# Altium PCB test_1.PcbDoc
Units mil, origin at the board's own origin, x right, y up, seen from the top; angles counter-clockwise.
Board outline 2760.03 x 1658.57 mil, 2 copper layers (Top Layer, Bottom Layer); 101 components, 102 nets, 399 pads, 126 vias.
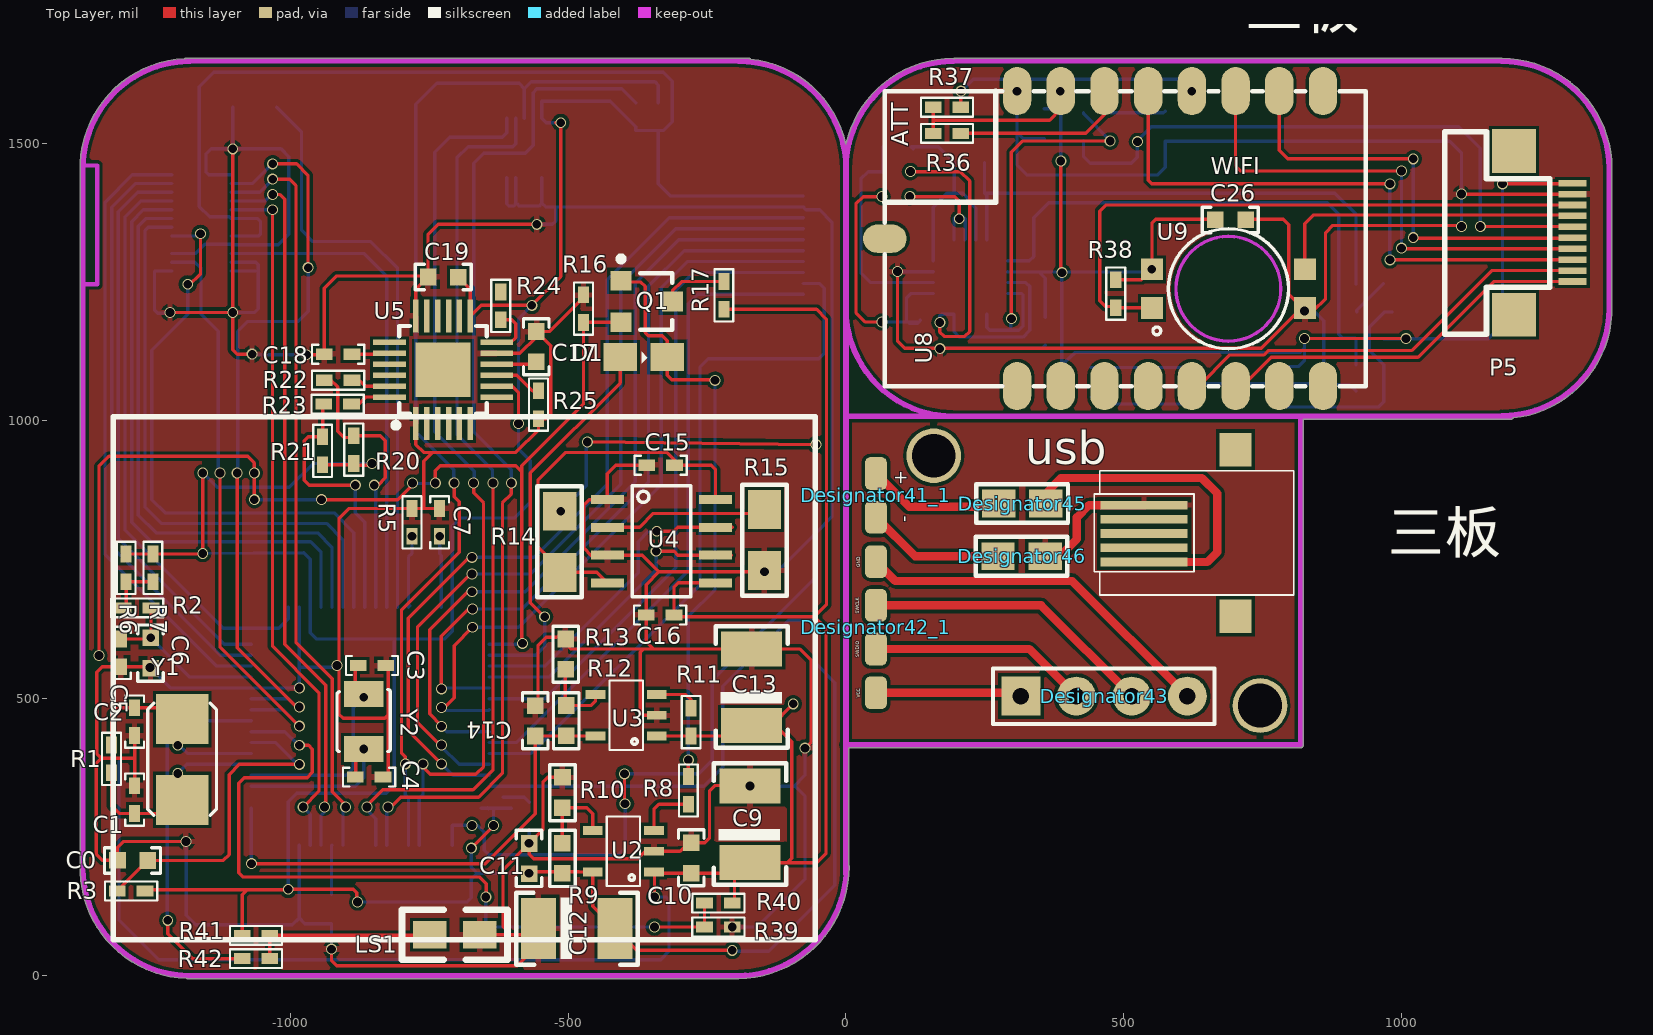
[diagram p0: Top Layer view]
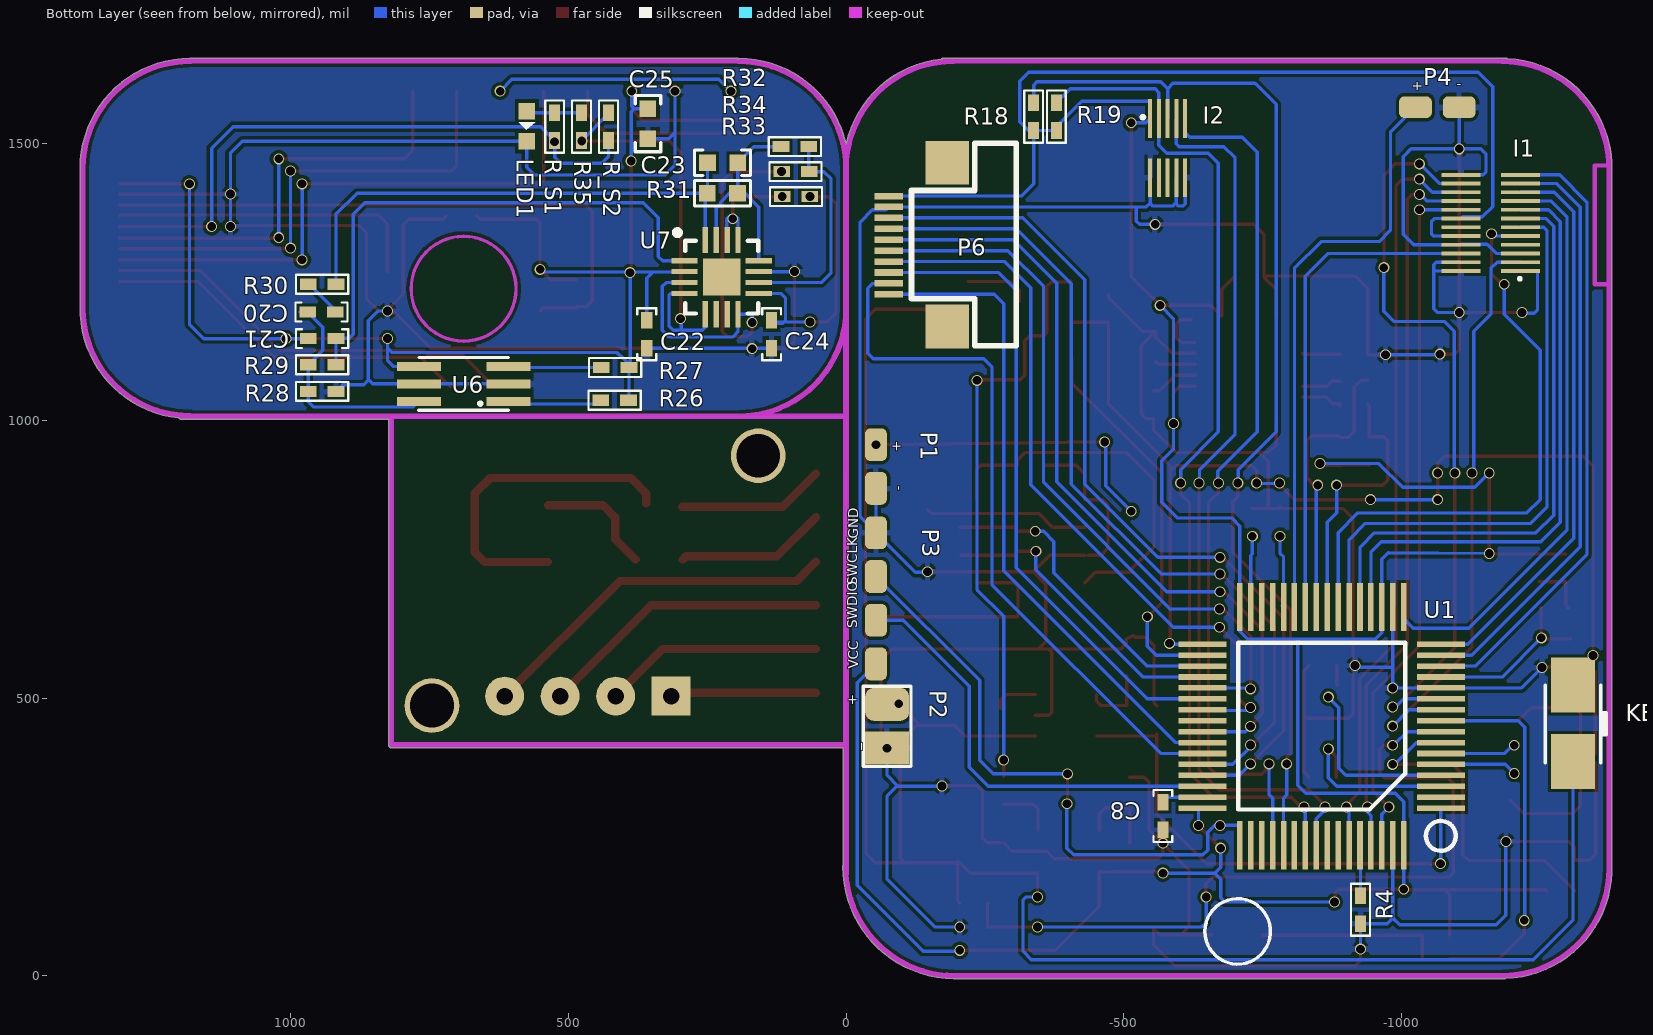
[diagram p1: Bottom Layer view, seen from below]

## Layer stack, top to bottom
Top Layer: signal copper 1.4
Dielectric: dielectric 12.6, FR-4, Dk 4.8
Bottom Layer: signal copper 1.4

## Board outline
-1188.38,-4.82 cw(c-1181.89,193) -1379.7,186.26 cw(c-1375,188) -1380.01,188 -1380.01,1462 cw(c-1375,1462) -1379.73,1463.65 cw(c-1182,1454.89) -1191.41,1652.59 cw(c-1188.46,1648.54) -1188.46,1653.56 -176,1653.56 cw(c-176,1648.54) -172.2,1651.82 cw(c-193.11,1455) -0.04,1498.6 cw(c193,1454.89) 193,1652.82 cw(c193,1647.8) 194.87,1652.46 cw(c198,1648.54) 198,1653.56 1179.46,1653.56 cw(c1179.46,1648.54) 1181.89,1652.93 cw(c1181.89,1455) 1379.82,1455 cw(c1374.8,1455) 1379.79,1454.48 cw(c1375,1453) 1380.02,1453 1380.02,1193 cw(c1375,1193) 1379.62,1191.05 cw(c1182,1202.11) 1202.17,1005.21 cw(c1198,1008) 1198,1002.98 824.02,1002.98 824.02,416 cw(c819,416) 819,410.99 5.02,410.99 5.02,199.14 cw(c0.66,196.66) 5.67,196.66 cw(c-196,196.66) -193.63,-5 cw(c-194,0) -194,-5.01 -1187,-5.01 cw(c-1187,0)

## Design rules (kind name [scope] priority, off if disabled: settings)
Clearance [All] p1: gap=6
PolygonConnect [All] p1: connectstyle=Relief reliefconductorwidth=10 reliefentries=4 polygonreliefangle="90 Angle"
RoutingVias [All] p1: holewidth=12 width=16 viastyle="Through Hole" minholewidth=28 minwidth=50 maxholewidth=28 maxwidth=50
SilkscreenOverComponentPads [All] p1: minsilkscreentomaskgap=10
SolderMaskExpansion [All] p1: expansion=4
Width [All] p1: maxlimit=20 minlimit=6 preferedwidth=6
27 further rules are at their usual default settings.

## Classes and differential pairs
component class test_watch: C0 C1 C2 C3 C4 C5 C6 C7 C8 C9 C10 C11 C12 C13 C14 C15 C16 C17 C18 C19 C20 C21 C22 C23 C24 C25 C26 D1 I1 I2 KEY1 LED1 LS1 P1 P2 P3 P4 P5 P6 Q1 R1 R2 R3 R4 R5 R6 R7 R8 R9 R11 R12 R14 R15 R16 R17 R18 R19 R20 R21 R22 R23 R24 R25 R26 R27 R28 R29 R30 R31 R32 R33 R34 R35 R36 R37 R38 R39 R40 R41 R42 R_S1 R_S2 U1 U2 U3 U4 U5 U6 U7 U8 Y1 Y2

## Components (designator, comment, footprint, x,y, rotation, side; value= is the part's Value field where it differs from the comment)
C0 "104" C_0603 -1258.02,207.9 r180 top
C1 "22pf" C_0402 -1281.8,342.47 r270 top
C2 "22pf" C_0402 -1281.8,432.98 r90 top
C3 "10pf" C_0402 -879.1,559.02 r0 top
C4 "10pf" C_0402 -884.1,358.02 r0 top
C5 "10uf" C_0402 -1305.9,606.98 r270 top
C6 "104" C_0603 -1252.9,608.98 r270 top
C7 "2.2uf" C_0402 -732.1,792.02 r90 top
C8 "2.2uf" C_0402 -571,313 r270 bottom
C9 "220uF" C_3528 -173,204 r90 top
C10 "104" C_0603 -279,185 r90 top
C11 "104" C_0603 -571,184 r90 top
C12 "220uF" C_3528 -554,85 r0 top
C13 "220uF" C_3528 -170,451 r90 top
C14 "104" C_0603 -560,432 r90 top
C15 "10uf" C_0402 -309,920 r180 top
C16 "10uf" C_0402 -360,650 r0 top
C17 "104" C_0603 -558,1161 r270 top
C18 "10uf" C_0402 -940,1120 r0 top
C19 "104" C_0603 -753,1259 r0 top
C20 "10uf" C_0402 920,1196 r0 bottom
C21 "2.2uf" C_0402 919,1148 r0 bottom
C22 "10uf" C_0402 359,1131 r90 bottom
C23 "0.01uf" C_0603 195,1465 r0 bottom
C24 "2.2uf" C_0402 134,1131 r90 bottom
C25 "104" C_0603 357,1508 r90 bottom
C26 "104" C_0603 720,1362 r180 top
D1 "1N4007" D_0805 -408,1114 r0 top
Designator41_1 "Comment" CHARGE_2 54,905 r270 top
Designator42_1 "Comment" SWD 54,510 r90 top
Designator43 "Comment" Header-4 315,504 r0 top
Designator45 "Comment" R_0805 275,851 r0 top
Designator46 "Comment" R_0805 274,756 r0 top
I1 "TFT_1.5" "DF37NB-24DS-0.4V - duplicate" -1215,1270 r0 bottom
I2 "TCH_IC_10" DF37NB-10DS-0.4V -611,1545 r270 bottom
KEY1 "button_2pin" SMD2_3.5 -1310,524 r270 bottom
LED1 "LED1" D_0603 575,1558 r270 bottom
LS1 "LSENS" 0805 -660,74 r180 top
P1 "contactor" CHARGE_2 -54,957 r270 bottom
P2 "CELL" CELL_2 -74,489 r270 bottom
P3 "Header 4" SWD -54,561.91 r90 bottom
P4 "MIC/LINE" CHARGE_2 -1026,1565 r180 bottom
P5 "Header-10" FPC_10_0.5 1309,1251 r90 top
P6 "Header-10" FPC_10_0.5 -77,1405 r270 bottom
Q1 "9013" SOT-23R -364,1215 r270 top
R1 "1M" R_0402 -1323.52,365.81 r90 top
R2 "10R" R_0402 -1302.1,663.02 r0 top
R3 "10k" R_0402 -1263.02,152.9 r180 top
R4 "10k" R_0402 -927.1,94.02 r90 bottom
R5 "100k" R_0402 -782.1,842.02 r270 top
R6 "0R" R_0402 -1296.98,710.1 r90 top
R7 "0R" R_0402 -1248.98,710.1 r90 top
R8 "100k" R_0402 -284,309 r90 top
R9 "16.7k" R_0603 -511,239 r270 top
R10 "Comment" R_0603 -510.94,357.5 r270 top
R11 "100k" R_0402 -279,482 r270 top
R12 "16.7k" R_0603 -504,487 r270 top
R13 "Comment" R_0603 -505,607 r270 top
R14 "0.4" R_1206 -516,837 r270 top
R15 "0.4" R_1206 -147,840 r270 top
R16 "2k" R_0402 -473,1177 r90 top
R17 "2k" R_0402 -220,1201 r90 top
R18 "4.7k" R_0402 -338,1573 r270 bottom
R19 "4.7k" R_0402 -379,1523 r90 bottom
R20 "4.7k" R_0402 -887,923 r90 top
R21 "4.7k" R_0402 -943,921 r90 top
R22 "120" R_0402 -940,1073 r0 top
R23 "120" R_0402 -941,1030 r0 top
R24 "120" R_0402 -622,1232 r270 top
R25 "120" R_0402 -554,1004 r90 top
R26 "10K" R_0402 392,1037 r0 bottom
R27 "10K" R_0402 391,1096 r0 bottom
R28 "30k" R_0402 919,1053 r0 bottom
R29 "100k" R_0402 919,1101 r0 bottom
R30 "22k" R_0402 969,1246 r180 bottom
R31 "20M" R_0603 250,1410 r180 bottom
R32 "100" R_0402 117,1494 r180 bottom
R33 "30K" R_0402 115,1404 r180 bottom
R34 "10k" R_0402 66,1449 r0 bottom
R35 "10k" R_0402 476.5,1555 r270 bottom
R36 "4.7K" R_0402 207,1518 r180 top
R37 "4.7k" R_0402 207,1565 r180 top
R38 "4.7k" R_0402 486,1204 r90 top
R39 "100k" R_0402 -205,88 r180 top
R40 "100k" R_0402 -255,131 r0 top
R41 "47K" R_0402 -1088,73 r0 top
R42 "1K" R_0402 -1038,31 r180 top
R_S1 "0R" R_0402 525,1505 r90 bottom
R_S2 "0R" R_0402 428,1505 r90 bottom
U1 "STM32F405RGT6" LQFP64 -1071.79,302.17 r0 bottom
U2 "SP3819M" SPX3819 -346,187 r180 top
U3 "SP3819M" SPX3819 -341,432 r180 top
U4 "TP4056" TP4056 -430,858 r0 top
U5 "MPU6050" MPU6050_QFN24 -726,1092 r90 top
U6 "SON1303" SON7015 608,1035 r0 bottom
U7 "SON3130" SON3130_QFN16 224,1259 r180 bottom
U8 "WIFI_USR" WIFI_USR 70,1595 r90 top
U9 "Comment" MLX90615 689,1238 r180 top
usb "Comment" MicroUSB 607,848 r270 top
Y1 "8M" TXAL_5032_2 -1196.24,316.9 r90 top
Y2 "32.768k" TXAL_3215 -869.1,507.02 r270 top

## Footprints (in the part's own frame and the unit in brackets; to place one, negate y for a bottom-side part, rotate by r counter-clockwise, add the part's x,y. Pads: shape width x height; smd on the part's side, far side on the other; paste and mask are expansions set on the pad)
0805 [mil]
  rect 60x50 smd: 1(0,-0.06) 2(90,-0.06)
  silkscreen extent -50,-45 140,45
C_0402 [mil]
  rect 30x20 smd: 1(0,0) 2(50,0)
  silkscreen extent -22,-17 72,17
C_0603 [mil]
  rect 30x30 smd: 1(0,0) 2(54.5,-0.06)
  silkscreen extent -23,-23 78,23
C_3528 [mm]
  rect 1.6x2.8 smd: 1(0,0) 2(3.5,0)
  silkscreen extent -1.02,-1.65 4.55,1.65
CELL_2 [mm]
  rrect50% 1.5x2 smd: 1(0,0)
  rect 1.5x2 smd: 2(2,0)
  silkscreen extent -0.84,-1.09 2.84,1.09
CHARGE_2 [mm]
  rrect50% 1.5x1 smd: 1(0,0) 2(2,0)
D_0603 [mil]
  rect 30x30 smd: 1(0,0) 2(54.5,-0.06)
  silkscreen extent 20,-15 34,15
D_0805 [mil]
  rect 60x50 smd: 1(1,1) 2(86,1)
  silkscreen extent 40,-10 50,10
DF37NB-10DS-0.4V [mil]
  rect 70x7 smd: 1(0,-62.99) 2(0,-47.24) 3(0,-31.5) 4(0,-15.75) 5(0,0) 6(107,0) 7(107,-15.75) 8(107,-31.5) 9(107,-47.24) 10(107,-62.99)
  silkscreen extent -5,-79 1,-73
"DF37NB-24DS-0.4V - duplicate" [mil]
  rect 70x7 smd: 1(0,0) 2(0,-15.75) 3(0,-31.5) 4(0,-47.24) 5(0,-62.99) 6(0,-78.74) 7(0,-94.49) 8(0,-110.24) 9(0,-125.98) 10(0,-141.73) 11(0,-157.48) 12(0,-173.23) 13(107,-173.23) 14(107,-157.48) 15(107,-141.73) 16(107,-125.98) 17(107,-110.24) 18(107,-94.49) 19(107,-78.74) 20(107,-62.99) 21(107,-47.24) 22(107,-31.5) 23(107,-15.75) 24(107,0)
  silkscreen extent -1,12 3,16
FPC_10_0.5 [mm]
  rect 2x2 smd: 0(-1.524,2.675) 0(5.969,2.675)
  rect 0.3x1.3 smd: 1(0,0) 2(0.5,0) 3(1,0) 4(1.5,0) 5(2,0) 6(2.5,0) 7(3,0) 8(3.5,0) 9(4,0) 10(4.5,0)
  silkscreen extent -2.41,1.04 6.86,5.84
Header-4 [mil]
  rect 70x70 hole 30: 1(0,0)
  round 70 hole 30: 2(100,0) 3(200,0) 4(300,0)
  silkscreen extent -50,-50 349,50
LQFP64 [mm]
  rect 2.2x0.254 smd: 1(0,0) 2(0,-0.5) 3(0,-1) 4(0,-1.5) 5(0,-2) 6(0,-2.5) 7(0,-3) 8(0,-3.5) 9(0,-4) 10(0,-4.5) 11(0,-5) 12(0,-5.5) 13(0,-6) 14(0,-6.5) 15(0,-7) 16(0,-7.5) 33(10.9,-7.5) 34(10.9,-7) 35(10.9,-6.5) 36(10.9,-6) 37(10.9,-5.5) 38(10.9,-5) 39(10.9,-4.5) 40(10.9,-4) 41(10.9,-3.5) 42(10.9,-3) 43(10.9,-2.5) 44(10.9,-2) 45(10.9,-1.5) 46(10.9,-1) 47(10.9,-0.5) 48(10.9,0)
  rect 0.254x2.2 smd: 17(1.7,-9.2) 18(2.2,-9.2) 19(2.7,-9.2) 20(3.2,-9.2) 21(3.7,-9.2) 22(4.2,-9.2) 23(4.7,-9.2) 24(5.2,-9.2) 25(5.7,-9.2) 26(6.2,-9.2) 27(6.7,-9.2) 28(7.2,-9.2) 29(7.7,-9.2) 30(8.2,-9.2) 31(8.7,-9.2) 32(9.2,-9.2) 49(9.2,1.7) 50(8.7,1.7) 51(8.2,1.7) 52(7.7,1.7) 53(7.2,1.7) 54(6.7,1.7) 55(6.2,1.7) 56(5.7,1.7) 57(5.2,1.7) 58(4.7,1.7) 59(4.2,1.7) 60(3.7,1.7) 61(3.2,1.7) 62(2.7,1.7) 63(2.2,1.7) 64(1.7,1.7)
  silkscreen extent -0.68,-7.56 9.26,1.95
MicroUSB [mm]
  rect 0.4x4 smd: 1(0,-1.778) 2(0.65,-1.778) 3(1.3,-1.778) 4(1.95,-1.778) 5(2.6,-1.778)
  rect 1.543x1.46 smd: 6(-2.54,2.413) 7(5.08,2.413)
  silkscreen extent -1.57,-4.06 4.11,5.08
MLX90615 [mm]
  rect 1x1 smd: 1(3.5,0.889) 2(3.5,-0.889) 3(-3.5,-0.889) 4(-3.5,0.889)
  silkscreen extent -2.75,-2.75 3.45,2.75
MPU6050_QFN24 [mm]
  rect 1.5x0.25 smd: 1(-2.457,1.25) 2(-2.457,0.75) 3(-2.457,0.25) 4(-2.457,-0.25) 5(-2.457,-0.75) 6(-2.457,-1.25) 13(2.457,-1.25) 14(2.457,-0.75) 15(2.457,-0.25) 16(2.457,0.25) 17(2.457,0.75) 18(2.457,1.25)
  rect 0.25x1.5 smd: 7(-1.25,-2.457) 8(-0.75,-2.457) 9(-0.25,-2.457) 10(0.25,-2.457) 11(0.75,-2.457) 12(1.25,-2.457) 19(1.25,2.457) 20(0.75,2.457) 21(0.25,2.457) 22(-0.25,2.457) 23(-0.75,2.457) 24(-1.25,2.457)
  rect 2.5x2.5 smd: 25(0,0)
  silkscreen extent -2.66,-2 2,2.28
R_0402 [mil]
  rect 30x20 smd: 1(0,0) 2(50,0)
  silkscreen extent -22,-17 72,17
R_0603 [mil]
  rect 30x30 smd: 1(0,0) 2(54.5,-0.06)
  silkscreen extent -23,-23 78,23
R_0805 [mil]
  rect 60x50 smd: 1(0,0) 2(85,0)
  silkscreen extent -40,-35 125,35
R_1206 [mil]
  rect 70x60 smd: 1(0,0) 2(110,0)
  silkscreen extent -45,-40 155,40
SMD2_3.5 [mm]
  rect 2.5x2 smd: 1(0,0) 2(3.5,0)
  silkscreen extent 0,-1.27 3.56,1.52
SON3130_QFN16 [mm]
  rect 1.2x0.24 smd: 1(-1.7,0.75) 2(-1.7,0.25) 3(-1.7,-0.25) 4(-1.7,-0.75) 9(1.7,-0.75) 10(1.7,-0.25) 11(1.7,0.25) 12(1.7,0.75)
  rect 0.24x1.2 smd: 5(-0.75,-1.7) 6(-0.25,-1.7) 7(0.25,-1.7) 8(0.75,-1.7) 13(0.75,1.7) 14(0.25,1.7) 15(-0.25,1.7) 16(-0.75,1.7)
  rect 1.7x1.7 smd: ""(0,0)
  silkscreen extent -2.16,-1.67 1.67,2.16
SON7015 [mm]
  rect 2x0.4 smd: 1(0,0) 2(0,-0.8) 3(0,-1.6) 4(4.1,-1.6) 5(4.1,-0.8) 6(4.1,0)
  silkscreen extent 0,-2.01 4.11,0.41
SOT-23R [mm]
  rect 0.9x0.95 smd: 1(-0.95,-1.048) 2(0.95,-1.048) 3(0,1.302)
  silkscreen extent -2.07,-1.17 1.3,1.3
SPX3819 [mm]
  rect 0.9x0.4 smd: 1(0,0) 2(0,-0.95) 3(0,-1.9) 4(2.8,-1.9) 5(2.8,0)
  silkscreen extent 0.63,-2.54 2.16,0.64
SWD [mm]
  rrect50% 1.5x1 smd: 1(0,0) 2(2,0) 3(4,0) 4(6,0)
TP4056 [mm]
  rect 1.513x0.42 smd: 1(0,0) 2(0,-1.27) 3(0,-2.54) 4(0,-3.81) 5(4.953,-3.81) 6(4.953,-2.54) 7(4.953,-1.27) 8(4.953,0)
  silkscreen extent 1.14,-4.44 3.81,0.64
TXAL_3215 [mm]
  rect 1.2x1.8 smd: 1(-0.025,0) 2(2.5,0)
  silkscreen extent -0.22,-1.22 2.62,1.22
TXAL_5032_2 [mm]
  rect 2.3x2.4 smd: 1(0,0) 2(3.7,0)
  silkscreen extent -0.71,-1.57 4.42,1.57
WIFI_USR [mm]
  oval 2.2x1.3 smd: 1(-13.525,-6.051) 2(-13.525,-8.051) 3(-13.525,-10.051) 4(-13.525,-12.051) 5(-13.525,-14.051) 6(-13.525,-16.051) 7(-13.525,-18.051) 8(-13.525,-20.051) 9(-0.025,-20.051) 10(-0.025,-18.051) 11(-0.025,-16.051) 12(-0.025,-14.051) 13(-0.025,-12.051) 14(-0.025,-10.051) 15(-0.025,-8.051) 16(-0.025,-6.051)
  oval 1.3x2 smd: 17(-6.775,0)
  silkscreen extent -13.53,-22 -0.03,0

## Part data
KEY1: library part KEY_2
LED1: library part LED2, "Typical RED, GR"
P1 U4: "³äµ"
P2: "锂?"
P4: library part H
U1: library part STM32F
U2 U3: "稳?"
U5: library part M
U6 U7: "ÐÄÂ"
U8: "wifiģ?"
Y1: library part XTAL_1, "32.768k"
Y2: library part XTAL_1

## Free pads (board coordinates)
  round 98.43 hole 78.74: 1(158,937) 2(746,487)

## Via types
v1: diameter 19.68, hole 15.75, Top Layer to Bottom Layer, 126 vias

## Nets (pads, with @x,y where several pads share a name; then routed paths per layer and width w, separated by ;. In a path a pad name is that pad's centre, name@x,y a point inside that pad or via, vN(x,y) a via of type N, cw(c..) or ccw(c..) an arc to the next point about the centre after c; other vN are vias at no path point)
A1: Designator41_1.1 Designator45.1 | length 265.9
  Top Layer w15: Designator41_1.1 114,845 Designator45.1@295,845
A2: Designator41_1.2 Designator46.1 | length 271.6
  Top Layer w15: Designator41_1.2 124.26,756 288,756 Designator46.1@294,750
A3: Designator42_1.4 Designator43.4 | length 661.3
  Top Layer w15: Designator42_1.4 88.72,711.5 407.5,711.5 Designator43.4
A4: Designator42_1.3 Designator43.3 | length 528.7
  Top Layer w15: Designator42_1.3 351.52,667.48 Designator43.3
A5: Designator42_1.2 Designator43.2 | length 396.1
  Top Layer w15: Designator42_1.2 330.26,588.74 Designator43.2
A6: Designator42_1.1 Designator43.1 | length 263.5
  Top Layer w15: Designator42_1.1 309,510 Designator43.1
C\H\_CHK: U1.35 U4.7 | length 574
  Top Layer w6: v1(-341,801) -310,801 -303,808 -205,808
  Bottom Layer w6: U1.35 -542.93,558.07 -374.5,726.5 -374.5,782.5 -356,801 v1(-341,801)
EN: D1.2 Q1.1 R8.2 | length 1062
  Top Layer w6: Q1.1 -402.86,1250 -370,1250 -362,1242 -362,1159 -356,1153 -331,1153 -322,1144 D1.2 -322,1082 -314,1074 v1@-236,1074 ; R8.2 v1(-284,389)
  Bottom Layer w6: v1(-284,389) -284,648 -236,696 v1(-236,1073)
EQ_CHK: R39.2 R40.1 U1.8 | length 1428.2
  Top Layer w6: v1(-985,415.43) -968.43,415.43 -961.54,408.54 -961.54,366.46 -971,357 -1084,357 -1094,347 -1094,186 -1086,178 -660,178 -648,166 v1@-648,143 ; v1(-345,88) R39.2 R40.1 R40.1@-256,130
  Bottom Layer w6: U1.8 -1010.96,439.96 v1@-988,417 ; v1(-649,142) -649,96 -641,88 v1(-345,88)
GND: C0.2 C1.1 C2.1 C3.2 C4.2 C5.2 C6.2 C7.2 C8.2 C9.2 C10.2 C11.2 C12.1 C13.2 C14.2 C15.2 C16.1 C17.1 C18.1 C19.1 I1.1 I1.3 I1.13 I1.21 I1.23 I1.24 I2.6 I2.7 I2.10 LS1.1 P1.2 P2.2 P3.4 P4.2 P6.2 R4.1 R5.1 R10.1 R13.1 R15.2 R16.2 R25.1 R39.1 U1.12 U1.18 U1.63 U2.2 U3.2 U4.1 U4.3 U5.1 U5.11 U5.18 | length 11098.1
  Top Layer w6: C1.1 -1281.8,393 ; C2.1 -1281.8,391.81 -1341.81,391.81 ; C6.2 v1(-1254.21,555.73) -1255.46,556.98 C5.2 -1340.02,556.98 -1350,547 -1350,400 -1341.81,391.81 ; v1(-1218,1195) v1(-1105,1195) ; v1(-1189,242) -1302,242 -1312.52,231.48 C0.2 -1339.96,207.96 -1351,219 -1351,382.61 -1341.81,391.81 ; v1@-1108,1490 -1105,1487 -1105,1128 -1097,1120 v1(-1070,1120) ; v1(-972,1119) -941,1119 C18.1 -940,1239 -918,1261 C19.1@-753,1261 ; v1(-927,48) -927,27 -918,18 -592,18 -554,56 C12.1 -565,74 -604,74 -604.06,74.06 ; C4.2 -824.67,367.45 -824.67,470 ; C3.2@-834.1,559.02 -824.67,549.59 -824.67,470 ; R5.1@-786,842.02 -894.98,842.02 -913.54,823.46 -913.54,471.54 -906,464 -830.67,464 -824.67,470 ; R5.1@-782.1,845.1 R5.1 -761,842.02 ; U5.1 -775.21,957.21 -761,943 -745,943 ; U5.18 -775.21,1236.79 C19.1 -753,1336 -735,1354 v1(-557,1354) ; C7.2 -761,842.02 ; LS1.1 -604.06,74.06 ; U5.11 -587.47,1121.53 -558,1151 C17.1 ; C14.2 -555,491.44 -555,595 -540,610 -521,610 -518,613 R13.1 -505,599 -494.8,588.8 -365,588.8 ; R10.1 -537.5,357.5 -546,349 -546,263.44 C11.2 ; R16.2 -473,1221.35 -533.35,1161 C17.1 ; U4.3@-436,758 -460,758 -472,770 -472,849 -463,858 U4.1 -430,905 -415,920 C15.2 ; U4.3 -367,758 -337,728 ; U3.2 -365.4,469.4 -371,475 -371,582.8 -365,588.8 ; C10.2@-283.94,239.5 -299.03,224.4 U2.2 -361.6,224.4 -375,211 -563,211 -570.94,218.94 C11.2 ; C10.2 -254.5,239.5 -246,248 -246,333 -236,343 -174.2,343 v1(-173,341.8) C9.2@-181.64,341.8 ; v1(-147,728) -286,728 -337,728 ; v1(-74,410.26) -63,421.26 -63,569 -82.8,588.8 C13.2 -347,588.8 ; -761,842.02 -761,927 -745,943 ; -745,943 -595,943 -554,984 R25.1 -541,1004 -532,1013 -532,1135 C17.1 ; -604.06,74.06 -618,88 -618,191.44 C11.2 ; -365,588.8 -347,588.8 ; -347,588.8 -347,589 -360,602 C16.1 -360,705 -337,728
  Bottom Layer w6: v1(-1254.21,555.73) -1217.19,518.7 U1.12 -995.26,518.7 -990.26,523.7 -985.18,528.79 -985.18,556 ; v1(-1218,1195) -1219,1194 -1240,1194 -1246,1200 -1246,1270 I1.1 ; I1.3 -1171.5,1301.5 -1155,1318 -1108.76,1318 I1.21 -1022.76,1317.24 -1004,1336 -1004,1476 -1018,1490 v1(-1105,1490) ; v1(-1189,242) -1189,109 -1172,92 -997.35,92 -985.18,104.18 ; I1.24 -1060,1270 ; I1.23 -1063.75,1285.75 -1059,1281 -1059,1271 -1060,1270 ; I1.13 -1148.23,1443.23 -1153,1448 -1153,1481 -1144,1490 v1(-1105,1490) ; v1(-1105,1195) -1066,1195 -1059,1202 -1059,1269 -1060,1270 ; P4.2 -1105,1564.74 v1(-1105,1490) ; v1(-1070,1120) -1069,1119 v1(-972,1119) ; U1.63 -985.18,104.18 ; U1.18 -985.18,556 ; v1(-927,48) -927.1,48.1 R4.1 -975.02,94.02 -985.18,104.18 ; v1(-917,559) -920,556 -985.18,556 ; I2.6 -611,1391 -607,1387 -599,1387 -595.25,1390.75 ; I2.7 -595.25,1390.75 ; v1(-571,239) C8.2 ; v1(-557,1354) -529,1354 -523,1360 -523,1385.31 ; I2.10 -548.01,1391.99 ; v1(-205,88) -160,88 -74,174 -74,324 -91.8,341.8 -93.2,341.8 ; v1(-173,341.8) -93.2,341.8 ; v1@-152,727 -125.13,727 P3.4 ; v1(-74,410.26) -74,361 -93.2,341.8 ; P1.2 P3.4 ; -595.25,1390.75 -592.75,1390.75 -589,1387 -553,1387 -548.01,1391.99 ; -548.01,1391.99 -541.33,1385.31 P6.2 -72.22,1380.54 -47.68,1380.54 -25.31,1358.17 -25.31,826.81 P3.4
  other v1: -985,518.7
GND_2: C22.1 C24.1 C25.1 C26.1 LED1.2 P5.9 R28.1 U6.2 U6.5 U7.11 U8.16 U9.4 | length 3697.6
  Top Layer w6: v1(92.84,1268.84) 92.84,1143.16 105.41,1130.59 748.17,1130.59 811.58,1194 U9.4@830,1194 ; C26.1@720,1369 726,1363 788,1363 798,1353 798,1228 823,1203 U9.4@823,1195 ; U9.4@842,1198 864,1220 864,1339 877,1352 v1@1109,1352 ; v1(1109,1408.48) 1109.32,1408.16 1308.68,1408.16 P5.9
  Bottom Layer w6: v1(92.84,1268.84) U7.11 ; C24.1 354,1131 356.5,1133.5 C22.1@359,1136 ; 308.22,1518.78 319,1508 C25.1 ; v1(308.22,1594) 308.22,1460.78 326.13,1442.87 561,1442.87 575.06,1456.94 LED1.2 1087.5,1503.5 1109,1482 v1(1109,1408.48) v1(1109,1350) ; U6.2 U6.5 852.5,1066.5 860,1074 869,1065 907,1065 R28.1 ; v1(826,1198) 843,1198 861,1180 861,1075
  other v1: 169,1130
HEART_CHK: P5.6 R_S1.1 R_S2.1 | length 1116.3
  Top Layer w6: v1(1143,1350) 1308.43,1350 P5.6
  Bottom Layer w6: R_S2.1 428,1476 440,1464 514,1464 525,1475 R_S1.1 550,1530 1104,1530 1143,1491 v1@1143,1351
  other v1: 525,1503
KEY_CHK: KEY1.1 Q1.2 R16.1 U1.33 | length 1994.5
  Top Layer w6: v1(-1346,577) -1346,918 -1328,936 -1078,936 -1066,924 v1(-1066,906) v1(-1066,858) ; v1(-945,858) -808,858 -781,885 v1@-781,893 ; v1(-740,888) -740,910 -731,919 -595,919 -584,908 ; v1@-578,601 -584,607 -584,908 ; Q1.2 -472.4,1177.6 R16.1 -473,1030 -584,919 -584,908
  Bottom Layer w6: v1@-1071,858 v1(-1066,858) v1(-945,858) ; v1@-781,887 -737,887 v1@-736,888 ; v1@-737,893 v1@-736,894 ; U1.33 -584.56,597.44 v1(-583,599)
  other v1: -781,888
LIGHT_CHK: R42.2 U1.9 | length 680.4
  Top Layer w6: v1(-1222,100) -1222,76 -1177,31 R42.2
  Bottom Layer w6: v1@-1222.86,100 -1222.86,447.79 -1211,459.65 U1.9
MLX_IIC_SCL: P5.7 U9.3 | length 576.4
  Top Layer w6: U9.3@826.8,1268 826.8,1354.8 842.84,1370.84 1307.27,1370.84 P5.7
MLX_IIC_SDA: P5.8 R38.1 U9.1 | length 1120.1
  Top Layer w6: U9.1@551.2,1198 545.2,1204 R38.1 484,1206 467,1206 457,1216 457,1378 467.8,1388.8 P5.8
MOTOR_CTR: P4.1 U1.27 | length 1052.4
  Bottom Layer w6: P4.1 -981,1520 -981,1343 -961,1323 -856.01,1323 -808.01,1275 U1.27
MPU_IIC_SCL: R20.2 R22.1 U1.25 | length 517.4
  Top Layer w6: R22.1 -928,1073 -916,1061 -916,981 -905,970 R20.2@-890,970 ; R20.2 -839,973 -830,964 -830,897 -843,884 v1@-854,884
  Bottom Layer w6: v1(-850,884) -847.38,881.38 U1.25
MPU_IIC_SDA: R21.2 R23.1 U1.24 | length 489.1
  Top Layer w6: R23.1 -943,1028 R21.2 -969,971 -976,964 -976,893 -967,884 v1(-884,884)
  Bottom Layer w6: v1(-884,884) -884,834 -867.07,817.07 U1.24
MPU_INT: R24.1
NetC1_2: C1.2 R1.1 U1.5 Y1.1 | length 341.5
  Top Layer w6: R1.1 -1323.52,306.41 -1309.58,292.47 C1.2 -1220.66,292.47 Y1.1
  Bottom Layer w6: v1(-1204.02,364.74) -1187.85,380.91 U1.5
NetC2_2: C2.2 R1.2 U1.6 Y1.2 | length 320.7
  Top Layer w6: R1.2 -1323.52,471.87 -1312.41,482.98 C2.2 -1234.42,482.98 Y1.2@-1212,460.57
  Bottom Layer w6: v1@-1204.02,417.43 -1187.19,400.59 U1.6
  other v1: -1204.02,415.43
NetC3_1: C3.1 U1.4 Y2.1 | length 361
  Top Layer w6: Y2.1@-884.1,523.02 C3.1@-884.1,559.02
  Bottom Layer w6: U1.4 -1071.72,361.16 -900.84,361.16 -887.94,374.06 -887.94,483.18 v1(-869.1,502.02)
NetC4_1: C4.1 U1.3 Y2.2 | length 317.1
  Top Layer w6: C4.1@-883.1,358.02 -883.1,394.6 v1(-869.1,408.6)
  Bottom Layer w6: U1.3 -884.46,341.54 -869.1,356.9 v1(-869.1,408.6)
NetC5_1: C5.1 C6.1 R2.2 U1.13 | length 318.5
  Top Layer w6: C5.1 -1254.9,606.98 v1(-1252.9,608.98) -1252.1,609.78 R2.2
  Bottom Layer w6: v1(-1252.9,608.98) -1182.31,538.39 U1.13
NetC7_1: C7.1 U1.31 | length 128.8
  Bottom Layer w6: v1(-732.1,792.02) -732.1,760.1 -729.27,757.27 U1.31
NetC8_1: C8.1 U1.47 | length 50.3
  Bottom Layer w6: U1.47@-617.66,321.85 -579.85,321.85 C8.1
NetC15_1: C15.1 R14.2 U4.4 U4.8 | length 681.8
  Top Layer w6: R14.2 -449,727 U4.4 ; R14.2@-516,734 -555,773 -555,893 -505,943 -323,943 -309,929 C15.1 -243,920 -235,912 U4.8
NetC17_2: C17.2 U5.10 | length 73.1
  Top Layer w6: U5.10 -583.84,1101.84 -562.72,1101.84 C17.2
NetC18_2: C18.2 U5.20 | length 67.9
  Top Layer w6: C18.2 -824.25,1120 U5.20
NetC20_1: C20.1 R30.1 | length 70.9
  Bottom Layer w6: C20.1 920,1199 R30.1@968,1247
NetC20_2: C20.2 R28.2 R29.2 U6.6 | length 404.4
  Bottom Layer w6: U6.6 779.42,1025 960,1025 969,1034 R28.2 R29.2@969,1100 ; R29.2 943,1127 943,1169 C20.2 C20.2@984,1196
NetC21_1: C21.1 R29.1 U7.1 | length 987.4
  Bottom Layer w6: U7.1 330.53,1288.53 338,1296 338,1366 365,1393 867,1393 888,1372 888,1156 895,1149 918,1149 C21.1 R29.1
NetC23_1: C23.1 R31.2 R32.1 U7.12 U7.15 | length 404.7
  Bottom Layer w6: R32.1@121.06,1489.94 R32.1 166,1494 C23.1 195,1410.44 R31.2 ; U7.12 157.07,1385.07 181.94,1409.94 R31.2 ; U7.15 233.84,1383.43 226,1391.27 226,1394 210.06,1409.94 R31.2
NetC23_2: C23.2 R30.2 R31.1 U7.16 | length 951.5
  Bottom Layer w6: C23.2 249.5,1410.5 R31.1 ; U7.16 253.53,1406.47 R31.1 ; R30.2 919,1372 881,1410 R31.1
NetC24_2: C24.2 R33.2 U7.9 | length 489.1
  Top Layer w6: v1(65,1178) 35,1178 18,1195 18,1391 31,1404 v1(65,1404)
  Bottom Layer w6: v1(65,1178) 112,1178 ; C24.2 C24.2@131,1178 ; U7.9 117.47,1229.47 109,1221 109,1181 112,1178 ; 112,1178 114,1176 129,1176 C24.2@131,1178 ; 112,1178 C24.2@131,1178
NetLED1_1: LED1.1 R35.1 R_S1.2 | length 99.7
  Bottom Layer w6: R35.1 R_S1.2 572,1555 LED1.1
NetLS1_2: LS1.2 R41.2 R42.1 | length 330.4
  Top Layer w6: R42.1 R41.2 -751.06,73 LS1.2
NetP1_1: P1.1 R14.1 | length 556.9
  Top Layer w6: v1(-466,962) v1(-54,957)
  Bottom Layer w6: v1(-514,837) -468,883 -468,960 v1(-466,962)
NetQ1_3: Q1.3 R17.2 | length 121.4
  Top Layer w6: Q1.3@-311,1216.74 Q1.3 -312.74,1234.26 -296,1251 R17.2
NetR4_2: R4.2 U1.60 | length 88.6
  Bottom Layer w6: R4.2@-927.1,147.02 -927.1,234.26 U1.60
NetR5_2: R5.2 U1.28 | length 133.4
  Bottom Layer w6: U1.28@-786.1,666.6 U1.28 -788.33,754.67 -782.1,760.9 v1(-782.1,792.02)
NetR8_1: R8.1 U2.3 | length 103.9
  Top Layer w6: U2.3 -346,300 -337,309 R8.1
NetR9_1: R9.1 R10.2 U2.4 | length 153.7
  Top Layer w6: R9.1 R10.2 -467,303 -456.24,292.24 U2.4
NetR11_1: R11.1 U3.3 | length 81.1
  Top Layer w6: U3.3 -288.8,506.8 -279,497 R11.1
NetR12_1: R12.1 R13.2 U3.4 | length 122.9
  Top Layer w6: R13.2@-506,540.44 -506,487 -460,487 -451.24,495.76 U3.4
NetR15_1: R15.1 U4.2 | length 296.3
  Top Layer w6: U4.2 -372,808 -347,833 -154,833 R15.1
NetR22_2: R22.2 U5.23 | length 70.8
  Top Layer w6: R22.2@-890,1071 -875,1071 -866.47,1062.47 U5.23
NetR23_2: R23.2 U5.24 | length 81.6
  Top Layer w6: R23.2@-891,1025 R23.2@-885,1031 ; R23.2@-891,1031 -877,1031 -865.21,1042.79 U5.24
NetR24_2: R24.2 U5.12 | length 92.8
  Top Layer w6: U5.12 -603.79,1141.21 -595,1150 -595,1175 -602,1182 R24.2
NetR25_2: R25.2 U5.9 | length 86.9
  Top Layer w6: U5.9 -593.16,1082.16 -565,1054 R25.2
NetR26_2: R26.2 U6.1 | length 173.3
  Bottom Layer w6: R26.2@442,1043 454.84,1030.16 603.16,1030.16 U6.1
NetR27_2: R27.2 U6.3 | length 167.8
  Bottom Layer w6: R27.2 606.01,1096 U6.3
NetR32_2: R32.2 R34.1 U7.10 | length 396.3
  Bottom Layer w6: R32.2 67,1450 R34.1 40,1449 27,1436 27,1267 44.84,1249.16 U7.10
NetR33_1: R33.1 U7.13 U7.14 | length 225.8
  Top Layer w6: v1(115,1404) 116,1404 196,1404 204,1396 v1(204,1364)
  Bottom Layer w6: U7.13 194.47,1364.47 199,1369 210,1369 215,1364 215,1326.77 U7.14
NetR34_2: R34.2 U7.3 U7.8 | length 800.5
  Top Layer w6: v1(116,1449) 206,1449 222.84,1432.16 222.84,1160.84 214,1152 177,1152 169,1160 v1(169,1177)
  Bottom Layer w6: v1(169,1177) 169,1189 172.07,1192.07 U7.8 194.47,1161 204.47,1151 319,1151 331,1163 331,1242.16 324,1249.16 U7.3
NetR35_2: R35.2 R_S2.2 U7.4 U7.5 | length 756.9
  Top Layer w6: v1(298,1184) 298,1484 318,1504 v1(476,1504)
  Bottom Layer w6: U7.5 253.53,1168.47 259,1163 297,1163 ; U7.4 315.53,1229.47 319,1226 319,1171 311,1163 297,1163 ; v1(298,1184) 297,1183 297,1163 ; R_S2.2 428,1553.5 R35.2
NetR36_1: R36.1 U8.14 | length 315
  Top Layer w6: R36.1 432,1518 465.7,1551.7 U8.14
NetR37_1: R37.1 U8.12 | length 461.7
  Top Layer w6: R37.1 v1(207,1594)
  Bottom Layer w6: v1@208,1594.18 229,1615.18 602,1615.18 v1(623.18,1594)
NRST: C0.1 R3.2 U1.7 | length 601.3
  Top Layer w6: R3.2 C0.1 -1122.1,207.9 -1111.5,218.5 -1111.5,362.5 -1093,381 v1(-985,381)
  Bottom Layer w6: U1.7 -1027.28,420.28 v1@-992,385
OFF/ON: D1.1 U1.34 | length 696.4
  Top Layer w6: v1@-550,653 -569,672 -569,906 -407,1068 D1.1
  Bottom Layer w6: U1.34 -559.24,577.76 -543,594 v1(-543,647)
P6_HEART_CHK: P6.5 U1.41 | length 1448.5
  Top Layer w6: v1@-728,448.5 v1(-729,449.5) -729,451 -750,472 -750,623.96 -681.96,692 v1(-674,692)
  Bottom Layer w6: v1(-729,449.5) -719.5,440 U1.41 U1.41 ; v1(-674,692) -578,692 -380,890 -380,1248 -301.74,1326.26 P6.5
P6_MLX_IIC_SCL: P6.4 U1.44 | length 1532.6
  Top Layer w6: v1@-730.38,414.38 -772,456 -772,629 v1@-675.5,725.5
  Bottom Layer w6: v1@-728,412 -696.91,380.91 U1.44 ; v1(-674,724) -568,724 -406,886 -406,1247 -307.06,1345.94 P6.4
  other v1: -729,415.75
P6_MLX_IIC_SDA: P6.3 U1.45 | length 1606.8
  Top Layer w6: v1(-729,382) -789,442 -789,644 v1@-676.5,756.5
  Bottom Layer w6: v1(-729,382) -708.22,361.22 U1.45 ; v1(-674,754) -562,754 -430,886 -430,1254 -318.37,1365.63 P6.3
P6_WIFI_LINK: P6.8 U1.38 | length 1176.7
  Bottom Layer w6: U1.38 -542.98,499.02 -307,735 -307,1235 -274.8,1267.2 P6.8
P6_WIFI_READY: P6.7 U1.39 | length 1337
  Top Layer w6: v1@-729,478 -706,501 -706,595 v1(-673,628)
  Bottom Layer w6: v1@-729,478 -643.99,478 U1.39 ; v1(-673,628) -590,628 -333,885 -333,1240 -286.11,1286.89 P6.7
  other v1: -729,483.25
P6_WIFI_RST: P6.6 U1.37 | length 1339.3
  Top Layer w6: v1(-729,517) -729,612 -680,661 v1(-673,661) v1@-673,654
  Bottom Layer w6: v1(-729,517) -727.3,518.7 U1.37 ; v1@-670.16,663.84 v1(-673,661) -585,661 ; -584.5,660.5 -356,889 -356,1242 -291.43,1306.57 P6.6
P6_WIFI_RXD: P6.10 U1.42 | length 1181.9
  Bottom Layer w6: U1.42 -593.72,420.28 -284.16,729.84 -284.16,1210.84 -267.17,1227.83 P6.10
P6_WIFI_TXD: P6.9 U1.43 | length 1290.3
  Bottom Layer w6: U1.43 -567.41,400.59 -263,705 -263,1097 -248,1112 -49,1112 -39,1122 -39,1238.52 -48,1247.52 P6.9
S\T\_CHK: U1.36 U4.6 | length 551.8
  Top Layer w6: v1(-342,765) -309.86,765 -302.86,758 U4.6 U4.6@-207,758
  Bottom Layer w6: U1.36 -535.61,538.39 -342,732 v1(-342,765)
SWCLK: P3.3 U1.49 | length 1103.9
  Top Layer w6: v1(-399,364) -399,311 v1(-398,310)
  Bottom Layer w6: U1.49 -709.59,270.41 -709,271 v1(-674,271) -664,271 -651.5,258.5 -651.5,226.5 -643,218 -410,218 -398,230 v1(-398,310) ; v1(-399,364) -265,364 -241,388 -241,532.39 P3.3
SWDIO: P3.2 U1.46 | length 798.3
  Bottom Layer w6: U1.46 -256,341.54 -222,375.54 -222,522 -103.35,640.65 P3.2
T_EINT: I2.4 U1.56 | length 1632.9
  Top Layer w6: v1@-867,303 -835,335 -672,335 -636,371 v1(-636,888)
  Bottom Layer w6: v1@-867,303 -867.07,302.93 -847.38,283.25 U1.56 ; v1@-637,882 -637,912 -701,976 -701,1474 -681,1494 -600,1494 -595.25,1498.75 I2.4
  other v1: -863.25,304
T_IIC_SCL: I2.2 R19.2 U1.55 | length 1845.5
  Top Layer w6: v1@-825,299 -802,322 -662,322 -619,365 -619,852 -603,868 v1(-603,888)
  Bottom Layer w6: U1.55 -827.7,296.3 v1@-825,299 ; v1(-603,888) -603,912 -671,980 -671,1464 -653,1482 -578,1482 -563.76,1496.24 I2.2 -563.76,1591.24 -557,1598 -404,1598 R19.2
  other v1: -825,304
T_IIC_SDA: I2.3 R18.1 U1.53 | length 1964.8
  Top Layer w6: v1(-794,382) -794,395 -801,402 -801,659 -697,763 -697,854 -706,863 v1(-706,888)
  Bottom Layer w6: v1@-794,376 -794,326 -788.33,320.33 U1.53 ; v1@-707,882 -707,912 -775,980 -775,1570 -737,1608 -589.01,1608 -579.5,1598.5 ; I2.3 -579.5,1598.5 ; R18.1 -338,1605 -344,1611 -567,1611 -579.5,1598.5
T_RST: I2.5 U1.52 | length 1577.9
  Top Layer w6: v1@-762,376 -749.16,363.16 -666.84,363.16 -653,377 -653,852 -671,870 v1(-671,888)
  Bottom Layer w6: U1.52 -768.64,320.36 -762,327 v1@-762,376 ; v1@-670,888 -670,909 -741,980 -741,1484 -714,1511 -619,1511 -611,1519 I2.5
  other v1: -762,382
TFT_D0: I1.12 U1.14 | length 1121.8
  Bottom Layer w6: I1.12 -1285.77,1443.23 -1335,1394 -1335,759 -1134.07,558.07 U1.14
TFT_D1: I1.11 U1.15 | length 1069.7
  Bottom Layer w6: I1.11 -1280.52,1427.48 -1323,1385 -1323,773 -1127.76,577.76 U1.15
TFT_D2: I1.10 U1.16 | length 1017.5
  Bottom Layer w6: I1.10 -1276.27,1411.73 -1311,1377 -1311,788 -1120.44,597.44 U1.16
TFT_D3: I1.9 U1.17 | length 1056.4
  Bottom Layer w6: I1.9 -1271.02,1395.98 -1299,1368 -1299,803 -1122,626 -1022,626 -1004.86,643.14 U1.17
TFT_D4: I1.8 U1.20 | length 1085
  Bottom Layer w6: I1.8 -1265.76,1380.24 -1287,1359 -1287,817 -1252,782 -964.81,782 -945.81,763 U1.20
TFT_D5: I1.7 U1.21 | length 1067.2
  Bottom Layer w6: I1.7 -1261.51,1364.49 -1275,1351 -1275,830 -1243,798 -952,798 -926.12,772.12 U1.21
TFT_D6: I1.6 U1.22 | length 1051.3
  Bottom Layer w6: I1.6 -1257.26,1348.74 -1263,1343 -1263,844 -1234,815 -936,815 -906.44,785.44 U1.22
TFT_D7: I1.5 U1.23 | length 1094.9
  Top Layer w6: v1@-1185,1243 -1163,1265 v1(-1163,1337)
  Bottom Layer w6: I1.5 -1167.01,1332.99 v1(-1163,1337) ; v1(-1186,1246) -1186,1192 -1251,1127 -1251,858 -1227,834 -922,834 -886.75,798.75 U1.23
TFT_LA: I1.22 U1.26 | length 893.5
  Bottom Layer w6: I1.22 -1053.5,1301.5 -868.5,1301.5 -827.7,1260.7 U1.26
TFT_RCS: I1.17 U1.62 | length 1261.7
  Top Layer w6: v1(-1033.24,1380.24) -1033.24,593.59 -949.54,509.89 -949.54,332.46 v1(-978,304)
  Bottom Layer w6: I1.17 -1043.24,1380.24 ; v1(-1033.24,1380.24) v1@-1033,1380 ; v1(-978,304) -965.49,291.49 U1.62
TFT_RD: I1.14 U1.11 | length 1368.7
  Top Layer w6: v1(-1097,906) -1097,591 v1@-986,480 ; v1(-1033,1463) -990,1463 -969.5,1442.5 -969.5,1276.5 v1(-969,1276)
  Bottom Layer w6: I1.14 -1069.52,1427.48 v1@-1033.5,1463.5 ; v1@-1096,907 -1096,1161 -1078,1179 -987,1179 -969,1197 v1(-969,1276) ; U1.11 -1005.02,499.02 v1@-986,480
  other v1: -985,484.28
TFT_RS: I1.16 U1.61 | length 1304
  Top Layer w6: v1(-1033,1407.67) -1019.67,1407.67 -1011,1399 -1011,597 -937.54,523.54 -937.54,308.46 v1@-942,304
  Bottom Layer w6: I1.16 -1047.02,1395.98 -1035.33,1407.67 v1(-1033,1407.67) ; U1.61 -945.81,289 -939.75,295.06 v1(-939.75,304)
TFT_RST: I1.2 U1.10 | length 1050.5
  Top Layer w6: v1(-1128,906) -1128,593 v1@-984.93,449.93
  Bottom Layer w6: I1.2 -1173,1285.75 -1162,1274.75 -1162,1192 -1131,1161 v1@-1131,909 ; U1.10 -1014.33,479.33 v1@-984.93,449.93
  other v1: -985,449.85
TFT_WR: I1.15 U1.59 | length 1349.5
  Top Layer w6: v1(-1033,1435.33) -1002.33,1435.33 -991,1424 -991,601 -925.54,535.54 -925.54,331.54 v1@-906,312
  Bottom Layer w6: I1.15 -1056.6,1411.73 v1(-1033,1435.33) ; U1.59 -906.44,299.06 v1(-901.5,304)
USB+: Designator45.2 usb.5 | length 591.8
  Top Layer w15: Designator45.2 360,869 385,894 ; 387,897 641,897 669,869 669,763.64 651,745.64 usb.5
USB-: Designator46.2 usb.1 | length 221.4
  Top Layer w15: Designator46.2@379,750 416,787 416,826 438,848 usb.1
VBAT: C14.1 R12.2 U1.1 U3.5 | length 898.1
  Top Layer w6: v1(-1071,202) -650.16,202 -560,292.16 C14.1 U3.5 ; C14.1@-560,435.5 C14.1@-559.5,435
  Bottom Layer w6: U1.1 -1071.79,202.79 v1(-1071,202)
VCC3.3: C11.1 C12.2 C19.2 I1.18 I1.20 I2.1 P3.1 P6.1 R3.1 R6.2 R7.2 R9.2 R18.2 R19.1 R20.1 R21.1 R41.1 U1.19 U1.32 U1.48 U1.64 U2.5 U5.8 U5.13 | length 7575.6
  Top Layer w6: R6.2 R7.2 -1163.9,760.1 v1(-1159,761) v1@-1159,905 ; R3.1 -1260.92,155 -1079,155 ; R41.1 -1088,146 -1079,155 ; v1@-1005,155 -1079,155 ; v1(-1005,156) -888,156 -881.44,149.44 -881.44,134.44 v1(-880,133) ; R21.1 -889,921 R20.1 -891,919 -890,920 -857,920 v1(-854,923) ; C19.2 -676.79,1237.22 U5.13 -657.51,1208 v1(-566,1208) -514,1260 -514,1528 v1@-523,1537 ; v1(-675,230) -638,267 v1@-631,267 ; U5.8 -601.47,1062.47 -590,1051 v1(-590,995) ; C11.1 -571,187.5 -481.06,187.5 ; R9.2@-518.56,187 U2.5 -456.24,125.03 C12.2 -377.2,46 v1(-205,46)
  Bottom Layer w6: v1(-1159,761) -977,762 -965.49,750.49 U1.19 -965.49,618 -954.49,607 -814,607 ; v1(-1159,906) -1133,880 -1003,880 -960,923 v1(-854,923) ; I1.20 -1058.01,1332.99 -1055,1336 -1055,1360 -1059.49,1364.49 I1.18 -1111.25,1367.74 -1146.73,1367.74 -1165,1386.01 -1165,1602 -1139,1628 -329,1628 -313,1612 -313,1539 -329,1523 R18.2 ; -1004.86,166 U1.64 -1004.86,313.94 -989.77,329.04 -828,329.04 -814,343.04 -814,607 ; v1(-880,133) -683,133 -675,141 -675,174 -664,185 ; v1(-675,230) -675,196 -664,185 ; U1.48@-646.38,303 U1.48@-645.55,302.17 ; v1(-635,271) -635,299.17 U1.48@-632,302.17 ; U1.48@-602.66,302.17 U1.48@-632,302.17 ; v1(-571,185) -664,185 ; v1(-566,1208) -590,1184 v1(-590,995) -590,949 -569,928 -569,853 -597,825 -695,825 -709.59,810.41 U1.32 -709.59,620.41 -723,607 -814,607 ; v1(-514,1537) -540.01,1537 I2.1 -548.01,1575.99 -424.99,1575.99 -379,1530 R19.1 R18.2 ; v1(-205,46) -203,44 -139,44 -20,163 -20,527.91 P3.1 ; P6.1 -316,1405 -338,1427 R18.2 ; U1.48@-645.55,302.17 U1.48 ; U1.48@-645.55,302.17 -657.02,302.17 U1.48 ; U1.48@-645.55,302.17 -644.1,300.72 U1.48 ; U1.48 U1.48@-632,302.17 ; U1.48 U1.48@-632,302.17
VCC3.3_2: C21.2 C22.2 C25.2 C26.2 P5.10 R26.1 R27.1 R36.2 R37.2 R38.2 U6.4 U7.2 U8.15 U9.2 | length 2859.2
  Top Layer w6: R36.2 157,1541.5 ; 157,1541.69 366.69,1541.69 386,1561 v1(386,1594) U8.15 ; 157,1543.5 R37.2@157,1567 ; v1(387,1468) 387,1269 v1(389,1267) ; R38.2 532.2,1254 U9.2 551.2,1356.2 558,1363 659.44,1363 C26.2@665.5,1369.06 ; v1(826,1148.16) 1008.84,1148.16 v1(1009,1148) ; v1(1183,1427) 1307.83,1427 P5.10
  Bottom Layer w6: U7.2 291.77,1268 348,1268 ; C25.2 381.5,1562.5 ; C22.2@359,1186 359,1257 348,1268 ; v1(386,1594) 386,1567 381.5,1562.5 ; v1(387,1468) 387,1557 381.5,1562.5 ; v1(389,1267) R27.1@389,1101 ; R26.1@392,1043 391,1044 R27.1 R27.1@389,1101 ; v1@551,1268 348,1268 ; U6.4 815.99,1097.99 826,1108 826,1131 ; v1(826,1148.16) 826,1131 ; C21.2 v1(1009,1148) 1157,1148 1183,1174 v1(1183,1427) ; R27.1@389,1101 413,1123 818,1123 826,1131
  other v1: 551,1273
VCC3.3A: R2.1 R6.1 R7.1 | length 100.2
  Top Layer w6: R2.1@-1299.1,663.02 R2.1 -1296.98,668.14 R6.1 R7.1
VCC4.2: C9.1 C10.1 C13.1 C16.2 KEY1.2 P2.1 R11.2 R17.1 R40.2 U2.1 U3.1 U4.5 | length 4032.4
  Top Layer w6: U2.1 U2.1@-345,186 ; v1(-345,142) U2.1@-345,186 ; U3.1 R11.2 -215,432 -196,451 C13.1 ; C16.2@-310,647 -196,647 ; C16.2 -310,700 -302,708 U4.5 ; R17.1 -53,1201 -35.16,1183.16 -35.16,668.84 -57,647 ; -219,647 -57,647 ; R40.2 -201,135 C9.1@-201,204 ; C9.1@-201,207 C9.1@-201,204 ; v1(-95,490) -134,451 C13.1 ; U2.1@-345,186 -344,185 C10.1 -224,185 -205,204 C9.1@-201,204 ; C9.1@-201,204 C9.1 -106,204 ; C13.1 -127,451 -98,422 -98,212 -106,204 ; -106,204 -53,204 -36,221 -36,626 -57,647
  Bottom Layer w6: KEY1.2 -1310,101 -1238.16,29.16 -333.84,29.16 -318.96,44.04 -318.96,110 -319,110.04 -319,137 -324,142 v1(-345,142)
WIFI_LINK: P5.3 U8.13 | length 1064.7
  Top Layer w6: U8.13 544.44,1433.56 551,1427 v1(980,1427) ; v1@980,1290.37 P5.3
  Bottom Layer w6: v1(980,1290) v1(980,1427)
WIFI_READY: P5.4 U8.11 | length 884.8
  Top Layer w6: U8.11 701.92,1459.08 711,1450 v1(1001,1450) ; v1@1001,1310.06 P5.4
  Bottom Layer w6: v1(1001,1311) v1(1001,1450)
WIFI_RST: P5.5 U8.10 | length 793.1
  Top Layer w6: U8.10 780.66,1487.34 796,1472 v1(1022,1472) ; v1@1022,1323 1028.16,1329.16 1308.42,1329.16 P5.5
  Bottom Layer w6: v1@1022,1323 v1(1022,1472)
  other v1: 1022,1330
WIFI_RXD: P5.1 U8.6 | length 685.2
  Top Layer w6: U8.6 714.03,1062.5 766.33,1114.81 1030.76,1114.81 1166.94,1251 P5.1
WIFI_TXD: P5.2 U8.5 | length 772.1
  Top Layer w6: U8.5 635.29,1062.5 691.38,1118.59 753.14,1118.59 761.36,1126.81 1019.81,1126.81 1163.69,1270.69 P5.2
pads on no net: I1.4 I1.19 I2.8 I2.9 P5.0 P6.0 U1.2 U1.29 U1.30 U1.40 U1.50 U1.51 U1.54 U1.57 U1.58 U5.2 U5.3 U5.4 U5.5 U5.6 U5.7 U5.14 U5.15 U5.16 U5.17 U5.19 U5.21 U5.22 U5.25 U7. U7.6 U7.7 U8.1 U8.2 U8.3 U8.4 U8.7 U8.8 U8.9 U8.17 usb.2 usb.3 usb.4 usb.6 usb.7

## Polygon pours and split planes (outlines as drawn)
GND on Bottom Layer "Mechanical 10-No Net" (solid, remove dead copper, pour order 13): 2,-2 -3,3 -3,1646 -1373,1646 -1374,1647 -1376,1645 -1376,-11
USB- on Bottom Layer "Mechanical 10-No Net" (solid, remove dead copper, pour order 11): 2,416 819,416 819,1007 1,1007 0,1008
GND_2 on Bottom Layer "Mechanical 10-No Net" (solid, remove dead copper, pour order 9): 0,1007 1,1008 1379,1008 1379,1641 1381,1643 1378,1646 -3,1646
GND_2 on Top Layer "Mechanical 10-No Net" (solid, remove dead copper, pour order 7): 0,1007 1373,1007 1376,1010 1371,1015 1371,1648 1,1648 0,1647
USB- on Top Layer "Mechanical 10-No Net" (solid, remove dead copper, pour order 5): 0,1007 819,1007 819,416 817,418 0,418
GND on Top Layer "Mechanical 10-No Net" (solid, remove dead copper, pour order 3): -1374,1646 -1369,1651 -3,1651 -3,-1 -6,-4 -1557,-4 -1377,-4

## Keep-outs
Keep-Out Layer:
  circle w6: c688.98,1238 r94.49
  lines w8: -1375,1460 -1349,1460 -1349,1246 -1373,1246
  lines w10: -1375,188 -1375,1462 ; -1374.91,1454.89 cw(c-1182,1454.89) -1182,1647.8 ; -1374.8,193 ccw(c-1181.89,193) -1181.89,0.09 ; -1188.46,1648.54 -176,1648.54 ; -1187,0 -194,0 ; -196,0 ccw(c-196,196.66) 0.66,196.66 ; -193.11,1647.91 cw(c-193.11,1455) -0.2,1455 ; 0,184 0,1478 ; 0,1007 0,418 2,416 819,416 819,1007 ; 0,1008 1198,1008 ; 0.09,1454.89 cw(c193,1454.89) 193,1647.8 ; 0.2,1201 ccw(c193.11,1201) 193.11,1008.09 ; 198,1648.54 1179.46,1648.54 ; 1181.89,1647.91 cw(c1181.89,1455) 1374.8,1455 ; 1182,1009.2 ccw(c1182,1202.11) 1374.91,1202.11 ; 1375,1193 1375,1453

## Silkscreen, mask and mechanical layers (free items; w line width, h text height)
Top Overlay:
  lines w10: -1320,65 -1320,1007 -55,1007 -55,65 -1320,65
  text "一板" at -840,1964 h130
  text "二板" at 720,1682 h130
  text "三板" at 975,737 h130
Bottom Overlay:
  circle w6: c-705.71,80.06 r59.06
Top Solder:
  text "Future Studio" at 1069,1574 h40

## Dimensions
-1375,1645 to 0,1685 on Top Overlay
-55,65 to 1001,380 on Top Overlay
-1375,1653.54 to -579.5,1438 on Top Overlay
-1375,1653.54 to -1162,1274.75 on Top Overlay
-1375,1648.54 to -1505,-5 on Top Overlay
-1375,1648.54 to -741,1491 on Top Overlay
-1375,1648.54 to -1225,1451 on Top Overlay
-1375,1653.54 to -1349,1246 on Top Overlay

## Text inside footprints (layer, text, board x,y; h text height)
Designator41_1: Top Overlay "-" at 90,829 h40 r270; Top Overlay "+" at 81,911 h40 r270
Designator42_1: Top Overlay "VCC" at 28,501 h10 r90; Top Overlay "SWDIO" at 27,574 h10 r90; Top Overlay "SWCLK" at 27,652 h10 r90; Top Overlay "GND" at 28,736 h10 r90
P1: Bottom Overlay "+" at -78,964 h30 r90; Bottom Overlay "-" at -82,883 h30 r90
P2: Bottom Overlay "_" at -27,419 h30 r90; Bottom Overlay "+" at 1,507 h30 r90
P3: Bottom Overlay "VCC" at -28,552.91 h30 r270; Bottom Overlay "SWDIO" at -27,625.91 h30 r270; Bottom Overlay "SWCLK" at -27,703.91 h30 r270; Bottom Overlay "GND" at -28,787.91 h30 r270
P4: Bottom Overlay "+" at -1019,1589 h30; Bottom Overlay "-" at -1100,1593 h30
U8: Top Overlay "ATT" at 112,1495 h30 r90; Top Overlay "WIFI" at 657,1444 h30